# Altium PCB treehopper.PcbDoc
Units mil, origin at the board's own origin, x right, y up, seen from the top; angles counter-clockwise.
Board outline 580 x 1290 mil, 2 copper layers (Top Layer, Bottom Layer), stack 34.296 mil thick; 15 components, 31 nets, 134 pads, 61 vias.
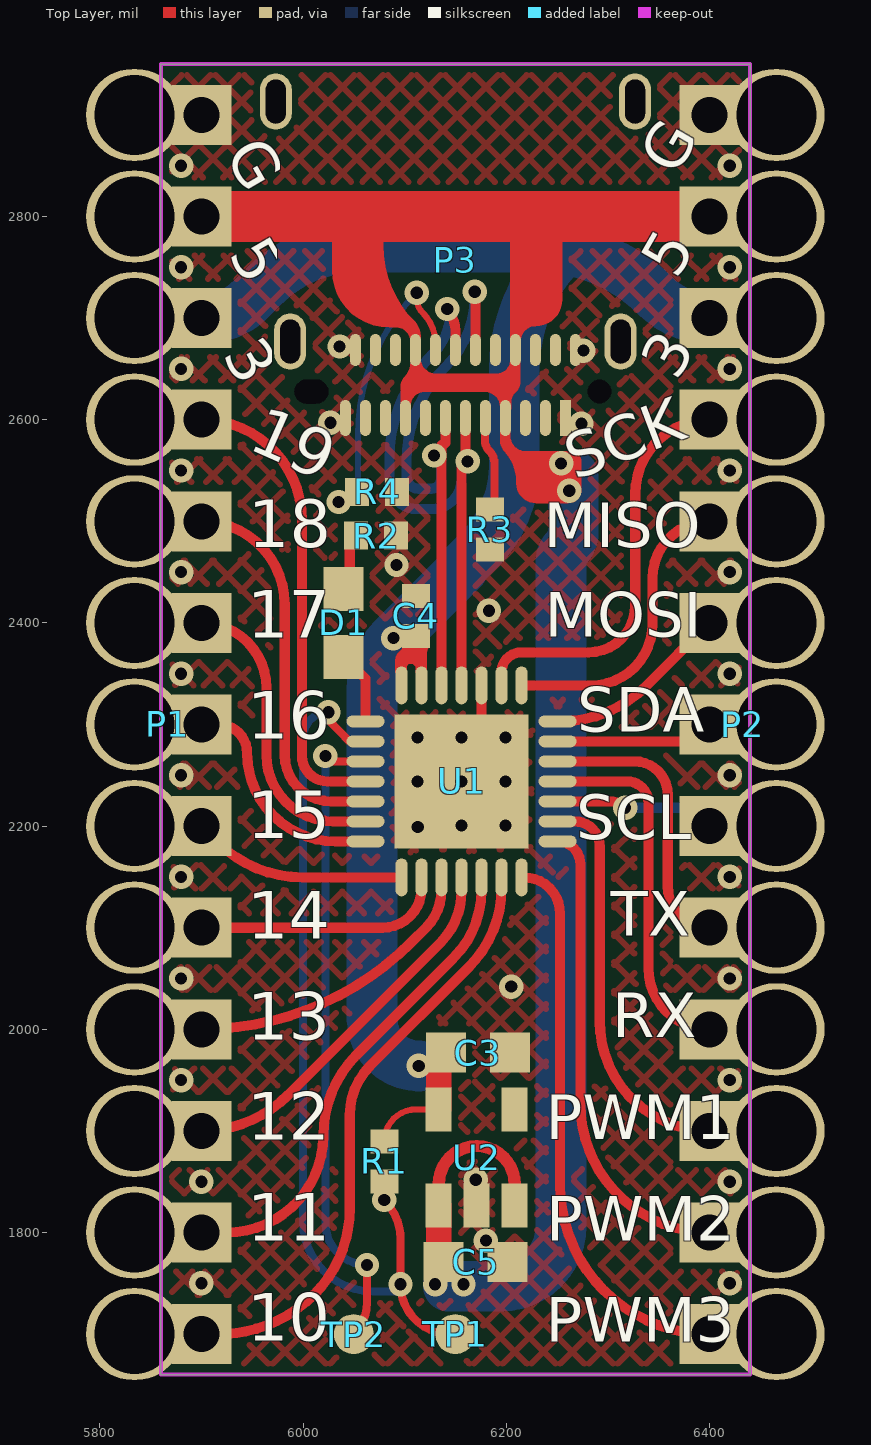
[diagram p0: Top Layer view]
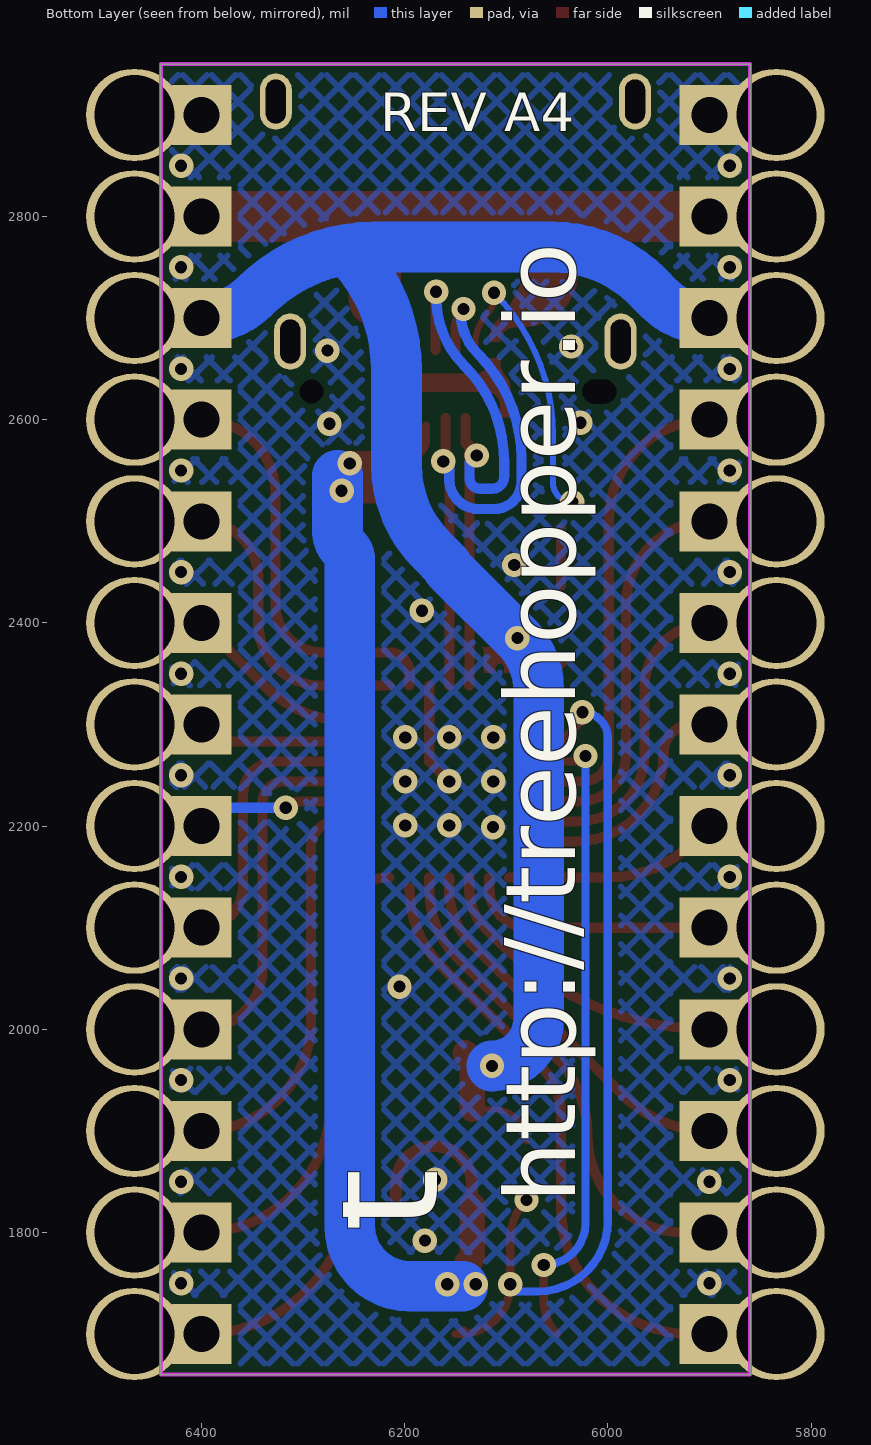
[diagram p1: Bottom Layer view, seen from below]
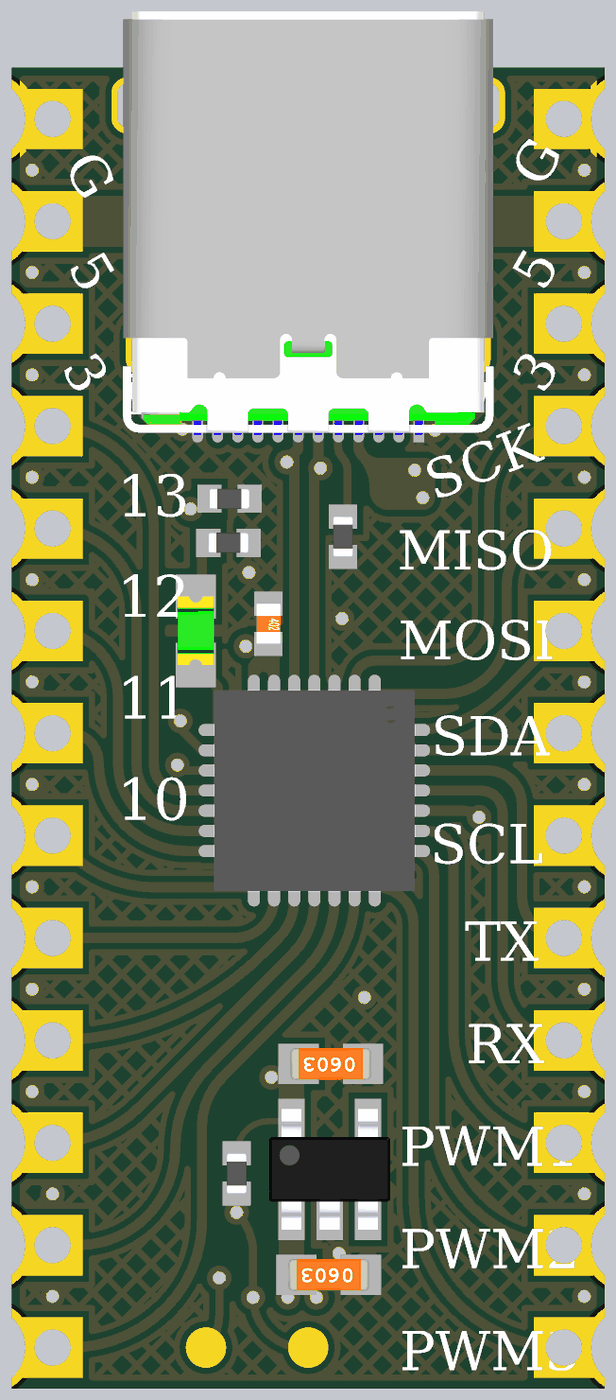
[diagram p2: 3D render of the assembled board from above, using the file's embedded part models]

## Layer stack, top to bottom
Top Solder: solder mask 0.4, Solder Resist, Dk 3.5
Top Layer: signal copper 1.4
Dielectric 1: dielectric 31.4961, FR-4, Dk 4.8
Bottom Layer: signal copper 1.4
Bottom Solder: solder mask 0.4, Solder Resist, Dk 3.5

## Board outline
5860,1660 6440,1660 6440,2950 5860,2950

## Design rules (kind name [scope] priority, off if disabled: settings)
Clearance [NOT (OnLayer('Keep-Out Layer'))] p1: gap=6
ComponentClearance [All] p1: gap=0 collisioncheckmode=3 verticalgap=0 showdistances=FALSE
DiffPairsRouting [All] p1: maxlimit=10 minlimit=6 mostfreqgap=10 toplayer_minwidth=6 toplayer_maxwidth=15 toplayer_prefwidth=8 bottomlayer_minwidth=6 bottomlayer_maxwidth=15 bottomlayer_prefwidth=8 maxuncoupledlength=500
HoleSize [All] p1: absolutevalues=TRUE maxlimit=500 minlimit=12 maxpercent=80.000 minpercent=20.000
HoleToHoleClearance [All] p1: gap=0 allowstackedmicrovias=TRUE
MinimumSolderMaskSliver [All] p1: minsoldermaskwidth=0
PlaneConnect [All] p1: planeconnectstyle=Direct reliefexpansion=20 reliefentries=4 reliefconductorwidth=10 reliefairgap=10
PolygonConnect [All] p1: connectstyle=Direct reliefconductorwidth=10 reliefentries=4 polygonreliefangle="90 Angle" airgapwidth=10
RoutingVias [All] p1: holewidth=12 width=24 viastyle="Through Hole" minholewidth=12 minwidth=24 maxholewidth=28 maxwidth=50
SilkToSilkClearance [All] p1: silktosilkclearance=0
SilkToSolderMaskClearance [IsPad] p1: minsilkscreentomaskgap=0 clearancetoexposedcopper=TRUE
SolderMaskExpansion [All] p1: expansion=0
Width [All] p1: maxlimit=500 minlimit=6 preferedwidth=8
22 further rules are at their usual default settings.

## Classes and differential pairs
differential pair USB_D: +USB_D_P -USB_D_N

## Components (designator, comment, footprint, x,y, rotation, side; value= is the part's Value field where it differs from the comment)
C3 "4u7" CAPC1608N 6172,1977 r180 top
C4 "100n" CAPC1005N 6111,2407 r270 top
C5 "4u7" CAPC1608N 6170,1771 r180 top
D1 "GREEN" LTST-C190GKT_NO_SILK 6040,2400 r90 top
P1 "Header 13" HDR1X13CASTELATED 5900,2900 r270 top
P2 "Header 13" HDR1X13CASTELATED 6400,1700 r90 top
P3 "12401610E4#2A" 12401610E4#2A 6150,2710 r270 top
R1 "1k" RESC1005N 6080,1870 r90 top
R2 "1k" RESC1005N 6072,2486 r180 top
R3 "5k1" RESC1005N 6184,2492 r90 top
R4 "5k1" RESC1005N 6073,2529 r180 top
TP1 "TESTPOINT" TESTPOINT100 6150,1700 r0 top
TP2 "TESTPOINT" TESTPOINT100 6050,1700 r0 top
U1 "EFM8UB10F16G-C-QFN28" QFN50P500X500X80_HS-29N_NO_SILK 6156,2244 r270 top
U2 "AP2112K-3.3" SOT23-5AN-no-silk 6171,1874 r90 top

## Footprints (in the part's own frame and the unit in brackets; to place one, negate y for a bottom-side part, rotate by r counter-clockwise, add the part's x,y. Pads: shape width x height; smd on the part's side, far side on the other; paste and mask are expansions set on the pad)
12401610E4#2A [mm]
  rect 0.9x0.27 smd: A1(2.75,2.75)
  oval 0.9x0.27 smd: A2(2.75,2.25) A3(2.75,1.75) A4(2.75,1.25) A5(2.75,0.75) A6(2.75,0.25) A7(2.75,-0.25) A8(2.75,-0.75) A9(2.75,-1.25) A10(2.75,-1.75) A11(2.75,-2.25) A12(2.75,-2.75)
  oval 0.8x0.27 smd: B1(1.05,-2.5) B2(1.05,-2) B3(1.05,-1.5) B4(1.05,-1) B5(1.05,-0.5) B6(1.05,0) B7(1.05,0.5) B8(1.05,1) B9(1.05,1.5) B10(1.05,2) B11(1.05,2.5) B12(1.05,3)
  oval 1.4x0.8 hole 0.5 slot 1.1 at 0 deg: MH(-5.16,4.49) MH(-5.16,-4.49) MH(0.84,4.13) MH(0.84,-4.13)
  round 0 hole 0.6 unplated: MH(2.09,3.6)
  round 0 hole 0.6 slot 0.85 at 90 deg unplated: MH(2.09,-3.6)
  body extent -7.49,-4.6 3.01,4.6, height 3.3
CAPC1005N [mm] "Chip Capacitor (0402), Body 1.0x0.5mm, IPC Medium Density"
  rect 0.6x0.7 smd: 1(-0.5,0) 2(0.5,0)
  body extent -0.5,-0.3 0.5,0.3, height 0.2
CAPC1608N [mm] "Chip Capacitor (0603), Body 1.6x0.8mm, IPC Medium Density"
  rect 1x1 smd: 1(-0.8,0) 2(0.8,0)
  body extent -1,-0.39 1,0.39, height 0.79
HDR1X13CASTELATED [mil] "Connector; Header; 13 Position, Castelated"
  rect 59x59 hole 35.43: 1(0,0) 2(100,0) 3(200,0) 4(300,0) 5(400,0) 6(500,0) 7(600,0) 8(700,0) 9(800,0) 10(900,0) 11(1000,0) 12(1100,0) 13(1200,0)
  oval 90.55x95 hole 78.74 mask+4: 1(0,-66) 2(100,-66) 3(200,-66) 4(300,-66) 5(400,-66) 6(500,-66) 7(600,-66) 8(700,-66) 9(800,-66) 10(900,-66) 11(1000,-66) 12(1100,-66) 13(1200,-66)
LTST-C190GKT_NO_SILK [mm] "Blue LED, 0603"
  rect 1.1x1 smd: 1(-0.85,0) 2(0.85,0)
  body extent -0.85,-0.45 0.85,0.45, height 0.9
QFN50P500X500X80_HS-29N_NO_SILK [mm] "QFN, 28-Leads, Body 5.00x5.00mm, Pitch 0.50mm, Thermal Pad 3.25x3.25mm, IPC Medium Density"
  oval 0.95x0.3 smd: 1(-2.4,1.5) 2(-2.4,1) 3(-2.4,0.5) 4(-2.4,0) 5(-2.4,-0.5) 6(-2.4,-1) 7(-2.4,-1.5) 15(2.4,-1.5) 16(2.4,-1) 17(2.4,-0.5) 18(2.4,0) 19(2.4,0.5) 20(2.4,1) 21(2.4,1.5)
  oval 0.3x0.95 smd: 8(-1.5,-2.4) 9(-1,-2.4) 10(-0.5,-2.4) 11(0,-2.4) 12(0.5,-2.4) 13(1,-2.4) 14(1.5,-2.4) 22(1.5,2.4) 23(1,2.4) 24(0.5,2.4) 25(0,2.4) 26(-0.5,2.4) 27(-1,2.4) 28(-1.5,2.4)
  rect 3.35x3.35 smd mask+0: 29(0,0)
  body extent -2.5,-2.5 2.5,2.5, height 1
RESC1005N [mm] "Chip Resistor, Body 1.1x0.5mm, IPC Medium Density"
  rect 0.6x0.7 smd: 1(-0.5,0) 2(0.5,0)
  body extent -0.5,-0.25 0.5,0.25, height 0.38
SOT23-5AN-no-silk [mm] "SOT23, 5-Leads, Body 2.9x1.6mm, Pitch 0.95mm, Lead Span 2.8mm, IPC Medium Density"
  rect 1.1x0.65 smd: 1(-1.2,0.95) 2(-1.2,0) 3(-1.2,-0.95) 4(1.2,-0.95) 5(1.2,0.95)
  body extent -1.5,-1.5 1.5,1.5, height 1.3
TESTPOINT100 [mm] "Testpoint, 1mm"
  round 1 smd paste-1: 1(0,0)

## Part data
C3 C5: library part "Cap Semi", "CAP SEMI 4U7 10V 0603"
C4: library part "Cap Semi", "CAP SEMI 0U1 10V 0402"
D1: library part LED_GREEN, "LED GREEN 0603"
P1 P2: "DNI"
P3: "USB TYPE-C RECEPTACLE"
R1 R2: library part "Res Semi", "RES SEMI 1K 0402"
R3 R4: library part "Res Semi", "RES SEMI 5K1 1% 0402"
TP1 TP2: "Testpoint"
U1: library part EFM8UB10F16G-B-QFN28, "IC MCU EFM8UB10F16G-C-QFN28 DATE CODE 1601 OR NEWER"
U2: "AP2112 IC REG LDO 3.3V 0.6A SOT25"

## Via types
v1: diameter 24, hole 12, Top Layer to Bottom Layer, tented both sides, 61 vias

## Nets (pads, with @x,y where several pads share a name; then routed paths per layer and width w, separated by ;. In a path a pad name is that pad's centre, name@x,y a point inside that pad or via, vN(x,y) a via of type N, cw(c..) or ccw(c..) an arc to the next point about the centre after c; other vN are vias at no path point)
3V3: C3.2 C4.2 P1.3 P2.11 R1.2 U1.6 U1.7 U2.5 | length 1561.3
  Top Layer w6: R1.2 cw(c6111.56,1889.68) 6111.56,1921.24 U2.5
  Top Layer w25: U2.5 6133.6,1960.33 cw(c6157.18,1960.33) C3.2
  Bottom Layer w50: P1.3@5900,2700 5904.54,2700 ccw(c5904.54,2761.46) 5948,2718 5961.17,2731.17 cw(c6054.91,2637.43) 6054.91,2770 6229.7,2770 cw(c6229.7,2602.7) 6257.29,2767.71 ; v1(6114,1964) cw(c6114,2010) 6068,2010 6068,2334.3 cw(c6139.7,2334.3) v1(6089,2385) 6156.59,2452.59 ccw(c6153.17,2456) 6158,2456 6173.15,2471.15 ccw(c6089,2555.29) 6208,2555.29 6208,2648.72 cw(c6376.28,2648.72) 6257.29,2767.71 ; P2.11@6400,2700 6398.7,2700 cw(c6398.7,2771.7) 6348,2721 ccw(c6229.7,2602.7) 6257.29,2767.71
5V: C5.2 P1.2 P2.12 P3.A4 P3.A9 P3.B4 P3.B9 U2.1 U2.3 | length 1604.5
  Top Layer w12: U2.1 6133.6,1847.6 cw(c6171,1847.6) 6171,1885 cw(c6171,1847.6) 6208.4,1847.6 U2.3
  Top Layer w25: U2.1 6133.6,1775.91 ccw(c6138.5,1775.91) C5.2
  Top Layer w50: P1.2@5900,2800 6049,2800 P2.12@6400,2800
  Bottom Layer w50: 6143,1747 6194.75,1747 ccw(c6194.75,1806.25) 6254,1806.25 6254,2460.93 cw(c6271.07,2460.93) 6259,2473 ccw(c6242.1,2489.9) 6266,2489.9 6266,2545
  other v1: 6130,1749 6158,1749 6262,2530 6254,2557
C2CK: R1.1 TP1.1 U1.9 | length 886.2
  Top Layer w8: v1(6025,2312) 6025,2304.28 6035.7,2293.58 6045.91,2283.37 U1.9 ; v1(6080,1832) cw(c6041.31,1793.31) 6095,1803.86 cw(c6041.31,1793.31) 6096.03,1793.31 v1(6096,1749) ; v1(6096,1749) ccw(c6145,1749) 6145,1700 TP1.1 cw(c6150,1712.01) TP1.1@6141.51,1703.52
  Bottom Layer w8: v1(6025,2312) ccw(c6025,2287) 6000,2287 6000,1811 ccw(c6069,1811) 6069,1742 6089,1742 ccw(c6089,1749) v1(6096,1749)
C2D: TP2.1 U1.10 | length 637.6
  Top Layer w8: v1(6022,2269) 6027.31,2263.68 U1.10 ; TP2.1 ccw(c6018.62,1731.38) 6063,1731.38 v1(6063,1768)
  Bottom Layer w8: v1(6022,2269) 6022,1809 ccw(c6063,1809) v1(6063,1768)
CC1: P3.A5 R3.2 | length 71.6
  Top Layer w8: P3.A5@6179,2594 6179,2579.87 ccw(c6194,2579.87) 6183.39,2569.27 cw(c6171.32,2557.2) 6188.39,2557.2 6188.39,2524.95
CC2: P3.B5 R4.2 | length 293.6
  Top Layer w6: v1(6112,2725) 6112,2719.49 ccw(c6132.49,2719.49) 6118,2705 cw(c6088.27,2675.27) 6129.42,2683.91 cw(c6088.27,2675.27) 6130.32,2675.27 P3.B5
  Bottom Layer w6: v1(6035,2519) ccw(c6035,2538) 6054,2538 6054,2584.98 cw(c6252.02,2584.98) v1(6112,2725)
GND: C3.1 C4.1 C5.1 P1.1 P2.13 P3.A1 P3.A12 P3.B1 P3.B12 R2.1 R3.1 R4.1 U1.3 U1.29 U2.2 | length 102.6
  Top Layer w10: v1(6156,2244) 6175.69,2263.68 U1.3
  other v1: 5900,1750 6420,1750 6180,1792 5900,1850 6420,1850 6170,1852 5880,1950 6420,1950 6205,2042 5880,2050 6420,2050 5880,2150 6420,2150 6113,2199 6156,2200.69 6156,2200.69 6199.31,2200.69 6112.69,2244 6199.31,2244 5880,2250 6420,2250 6112.69,2287.31 6156,2287.31 6199.31,2287.31 5880,2350 6420,2350 6183,2412 5880,2450 6420,2450 6092,2457 5880,2550 6420,2550 6274,2596 6027,2597 5880,2650 6420,2650 6276,2668 6036,2672 5880,2750 6420,2750 5880,2850 6420,2850
LED: D1.1 U1.8 | length 72.4
  Top Layer w10: D1.1 6061.51,2345.02 U1.8
MISO: P2.9 U1.1 | length 296.4
  Top Layer w10: U1.1 6283.49,2338.49 ccw(c6283.49,2399) 6344,2399 6344,2444 cw(c6400,2444) P2.9@6400,2500
MOSI: P2.8 U1.28 | length 184.5
  Top Layer w10: U1.28 6253.76,2303.06 ccw(c6253.76,2422.06) 6337.91,2337.91 P2.8@6400,2400
NetD1_2: D1.2 R2.2 | length 56.2
  Top Layer w10: D1.2@6046,2436.46 R2.2@6046,2492.68
PIN10: P1.13 U1.20 | length 585
  Top Layer w10: P1.13@5900,1700 5916.85,1700 ccw(c5916.85,1833.15) 5943.12,1702.62 ccw(c5916.85,1833.15) 6011,1739 ccw(c5926.5,1823.5) 6044.38,1803.88 ccw(c5926.5,1823.5) 6046,1823.5 6046,1915.72 cw(c6114.28,1915.72) 6066,1964 6163.1,2061.1 ccw(c6085.21,2139) U1.20@6195.37,2139
PIN11: P1.12 U1.19 | length 484.2
  Top Layer w10: P1.12@5900,1800 5924.63,1800 ccw(c5924.63,1895.37) 6020,1895.37 cw(c6132.57,1895.37) 6052.97,1974.97 6148.01,2070.01 ccw(c6081.16,2136.84) 6175.69,2136.84 U1.19
PIN12: P1.11 U1.18 | length 376.6
  Top Layer w10: P1.11@5900,1900 ccw(c5900,2020.71) 5949.71,1910.71 ccw(c5900,2020.71) 5985.36,1935.36 6135,2085 ccw(c6084.3,2135.7) 6152.47,2113.47 ccw(c6084.3,2135.7) 6156,2135.7 U1.18
PIN13: P1.10 U1.17 | length 303.5
  Top Layer w10: P1.10@5900,2000 ccw(c5900,2292.12) 6106.56,2085.56 6121,2100 ccw(c6084.03,2136.97) 6136.31,2136.97 U1.17
PIN14: P1.9 U1.16 | length 249.6
  Top Layer w10: P1.9@5900,2100 6078.18,2100 ccw(c6078.18,2138.45) 6116.63,2138.45 U1.16
PIN15: P1.8 U1.15 | length 212.7
  Top Layer w10: P1.8@5900,2200 5915.63,2184.37 ccw(c5999.78,2268.51) 5999.78,2149.51 U1.15
PIN16: P1.7 U1.14 | length 227.2
  Top Layer w10: P1.7@5900,2300 5917,2300 cw(c5917,2272) 5945,2272 ccw(c6032.06,2272) 6032.06,2184.94 U1.14
PIN17: P1.6 U1.13 | length 301.4
  Top Layer w10: P1.6@5900,2400 cw(c5900,2336) 5964,2336 5964,2270 ccw(c6029.37,2270) 6029.37,2204.63 U1.13
PIN18: P1.5 U1.12 | length 382.4
  Top Layer w10: P1.5@5900,2500 cw(c5900,2418) 5982,2418 5982,2270 ccw(c6027.69,2270) 6027.69,2224.31 U1.12
PIN19: P1.4 U1.11 | length 464.3
  Top Layer w10: P1.4@5900,2600 cw(c5900,2501) 5999,2501 5999,2269 ccw(c6024,2269) 6024,2244 U1.11
PWM1: P2.3 U1.23 | length 397.3
  Top Layer w10: U1.23 6267.51,2204.63 cw(c6267.51,2180.14) 6292,2180.14 6292,2008 ccw(c6400,2008) P2.3@6400,1900
PWM2: P2.2 U1.22 | length 470.3
  Top Layer w10: U1.22 cw(c6250.49,2162.43) 6273,2162.43 6273,1927 ccw(c6400,1927) P2.2@6400,1800
PWM3: P2.1 U1.21 | length 556.1
  Top Layer w10: U1.21 6217.49,2149.51 cw(c6217.49,2114) 6253,2114 6253,1847 ccw(c6400,1847) P2.1@6400,1700
RX: P2.4 U1.25 | length 358.7
  Top Layer w10: U1.25 6319,2244 cw(c6319,2223) 6340,2223 6340,2060 ccw(c6400,2060) P2.4@6400,2000
SCK: P2.10 U1.2 | length 406.6
  Top Layer w10: U1.2 6195.37,2351.37 cw(c6215,2351.37) 6195.92,2355.97 cw(c6215,2351.37) 6215,2371 6281,2371 ccw(c6281,2417) 6327,2417 6327,2527 cw(c6400,2527) P2.10@6400,2600
SCL: P2.6 U1.24 | length 225.3
  Top Layer w10: U1.24 6301.75,2224.31 cw(c6301.75,2202.75) v1(6317,2218)
  Bottom Layer w10: v1(6317,2218) 6380,2218 6381,2219 6386,2214 cw(c6386,2200) 6400,2200 6427.03,2200 6404.03,2223 P2.6@6400,2223
SDA: P2.7 U1.27 | length 156.4
  Top Layer w10: U1.27 6383.37,2283.37 P2.7@6400,2300
TX: P2.5 U1.26 | length 281.6
  Top Layer w10: U1.26 6326.31,2263.68 cw(c6326.31,2231) 6359,2231 6359,2141 ccw(c6400,2141) P2.5@6400,2100
USB_D_N: P3.A7 P3.B7 U1.5 | length 587.3
  Top Layer w10: U1.5 6136.24,2338.57 6136.24,2575 6137.82,2575 6140.16,2577.34 P3.A7 ; P3.B7 v1@6169.69,2718.1
  Bottom Layer w10: v1(6129,2564.81) 6136,2557.81 6136,2542.28 cw(c6125.72,2542.28) 6125.72,2532 6114,2532 cw(c6114,2544) 6102,2544 6102,2558.85 cw(c6235.15,2558.85) 6141,2653 ccw(c6073.4,2720.6) 6168.9,2716.26 ccw(c6073.4,2720.6) 6169,2720.6 v1(6169,2726)
USB_D_P: P3.A6 P3.B6 U1.4 | length 613.9
  Top Layer w10: v1(6142,2709) 6142,2707 cw(c6122.69,2687.69) 6150,2687.69 P3.B6 ; v1@6155.92,2559 6155.92,2338.57 U1.4 ; v1@6159.84,2565.56 P3.A6
  Bottom Layer w10: v1(6142,2709) 6142,2708.41 6143,2707.41 6142.59,2707 ccw(c6142.59,2710.41) 6145,2708 6145,2706.04 cw(c6086.96,2706.04) 6128,2665 ccw(c6231.81,2561.19) 6085,2561.19 6085,2539 ccw(c6112,2539) 6112,2512 6127,2512 ccw(c6127,2541) 6156,2541 6156,2553 cw(c6162,2553) v1(6162,2559)
pads on no net: P3.A2 P3.A3 P3.A8 P3.A10 P3.A11 P3.B2 P3.B3 P3.B8 P3.B10 P3.B11 P3.MH U2.4

## Polygon pours and split planes (outlines as drawn)
GND on Bottom Layer "BOTTOM_GND" (hatched 45Degree grid 20 track 6, remove dead copper, pour order 0): 5850,2950 6450,2950 6450,1650 5856,1650 5850,1650
GND on Top Layer "BOTTOM_GND" (hatched 45Degree grid 20 track 6, remove dead copper, pour order 2): 5850,2950 6450,2950 6450,1650 5850,1650

## Keep-outs
Keep-Out Layer:
  the board outline again, w3.94

## Other copper
Top Layer:
  region net 3V3: 6102,2351 6102,2356 cw(c6106,2356) 6106,2360 cw(c6106,2355) 6111,2355 6111,2351 6122,2351 6122,2371.17 cw(c6128.83,2371.17) 6124,2376 6098,2376 cw(c6095.59,2376) 6097.29,2374.29 6094,2371 ccw(c6101.24,2363.76) 6091,2363.76 6091,2351
  region net 5V: 6204,2673 6204,2803 6255,2803 6255,2718 cw(c6229,2718) 6229,2692 ccw(c6229,2677) 6214,2677 6214,2673
  region net 5V: 6115.81,2676.82 6115.81,2682.33 ccw(c6095.33,2682.33) 6109.81,2696.82 cw(c6184.65,2771.66) 6078.81,2771.66 6078.81,2775 6028.81,2775 6028.81,2746.82 ccw(c6084.81,2746.82) 6084.81,2690.82 6091.81,2690.82 cw(c6091.81,2676.82) 6105.81,2676.82
  region net 5V: 6106,2602.46 6106,2613.46 cw(c6119.5,2613.96) 6119,2627.46 6180,2627.46 cw(c6178.5,2611.97) 6194,2610.46 6205,2610.46 6205,2616.81 cw(c6218.66,2616.81) 6209,2626.46 ccw(c6196.93,2638.53) 6214,2638.54 6214,2659.46 6204,2659.46 cw(c6190.5,2658.96) 6191,2645.46 6130,2645.46 cw(c6130.5,2659.96) 6116,2660.46 6106,2660.46 6106,2656.95 cw(c6085.53,2656.94) 6100,2642.46 ccw(c6109.65,2632.81) 6096,2632.81 6096,2602.46
  region net 5V: 6204,2599 6204,2584 ccw(c6219,2584) 6219,2569 6264,2569 cw(c6264,2559) 6274,2559 6274,2531 cw(c6261,2531) 6261,2518 6229,2518 cw(c6229,2537) 6210,2537 ccw(c6167.08,2539.22) 6199,2568 cw(c6210.99,2580.04) 6194,2580 6194,2599

## Silkscreen, mask and mechanical layers (free items; w line width, h text height)
Top Overlay:
  text "G" at 5910,2854 h75 r300
  text "G" at 6379,2831 h75 r60
  text "5" at 5914,2756 h75 r300
  text "5" at 6380,2730 h75 r60
  text "3" at 5908,2657 h75 r300
  text "3" at 6380,2630 h75 r60
  text "19" at 5938,2558 h80 r336.16
  text "SCK" at 6273,2527 h75 r20.67
  text "MISO" at 6237,2460 h75
  text "18" at 5946,2459 h80
  text "MOSI" at 6238,2372 h75
  text "17" at 5944.96,2370.35 h80
  text "SDA" at 6270.13,2278.63 h75
  text "16" at 5944.96,2270.94 h80
  text "15" at 5944.96,2172.71 h80
  text "SCL" at 6269,2173 h75
  text "TX" at 6303.02,2077.89 h75
  text "14" at 5944.96,2073.88 h80
  text "RX" at 6304.27,1977.78 h75
  text "13" at 5944.96,1974.47 h80
  text "PWM1" at 6239,1877.67 h75
  text "12" at 5944.96,1876.24 h80
  text "PWM2" at 6239.24,1777.56 h75
  text "11" at 5944.96,1776.82 h80
  text "10" at 5944.96,1678 h80
  text "PWM3" at 6239,1678 h75
Bottom Overlay:
  text "REV A4" at 6224,2871 h65
  text "http://treehopper.io" at 6009,1829 h120 r270
  text "t" at 6130,1800 h200 r270